# EAGLE board The_Potato (EAGLE 9.6.2)

Size 83 x 74 mm. Coordinates in mm from the lower left corner, seen from the top.
Outline: 0,0 0,74 83,74 83,0 0,0
Copper layers (1*16): Top 0.035mm / dielectric 1.5mm / Bottom 0.035mm
Design rules "default": minimum track width 6mil, minimum drill 0.35mm, track to track 6mil, track to pad 6mil, pad to pad 6mil, via to via 6mil, smd to smd 6mil, copper to edge 40mil, drill to drill 6mil, minimum pad ring 10mil, minimum via ring 8mil, stop-mask expansion 4mil, vias tented up to drill 0mil, thermal gap 10mil
Holes 3.2 mm at 3,3 3,71 80,3 80,71 42.5,20 42.5,54

## Footprints (pad centres in the part's own frame; a part is rotated, then mirrored left to right if it is on the bottom)
DIN7_270 = hole 1.6: -2.475,-2.475; -3.5,0; -2.475,2.475; 0,3.5; 2.475,2.475; 3.5,0; 2.475,-2.475
DIN4_216 = hole 1.6: -3.329,-1.082; -2.057,2.832; 2.057,2.832; 3.329,-1.082
DIN8_262 = hole 1.6: 0,-0.9; -3.3,-2.9; -3.5,0; -2.47,2.47; 0,3.5; 2.47,2.47; 3.5,0; 3.3,-2.9
DIN6_240 = hole 1.6: 0,0; -3.031,-1.75; -3.031,1.75; 0,3.5; 3.031,1.75; 3.031,-1.75
DIN8_270 = hole 1.6: 0,-0.9; -2.475,-2.475; -3.5,0; -2.475,2.475; 0,3.5; 2.475,2.475; 3.5,0; 2.475,-2.475
DIN5_360 = hole 1.6: 0,0; -2.475,-2.475; -2.475,2.475; 2.475,2.475; 2.475,-2.475

## Placement (x,y rotation side)
E$1  [DIN7_270]  32.5,12.5 0 top
E$2  [DIN4_216]  52.5,12.5 0 top
E$3  [DIN8_262]  32.5,36 0 top
E$4  [DIN6_240]  52.5,36 0 top
E$5  [DIN8_270]  32.5,59.5 0 top
E$6  [DIN5_360]  52.5,59.5 0 top
E$7  [SVEN_TAG]  64.61,58.66 0 top
E$8  [OPENHW]  68.41,53 0 top
E$9  [2LAYER]  80,68.5 180 top
E$10  [POTATO]  44.5,64 0 top
E$11  [PCB-TITLE/]  0,81.5 0 top  (outside the outline)
E$12  [ATTENTION]  38.5,43.5 0 top
E$13  [ATTENTION]  46.5,42.5 0 bottom
E$14  [DEKANTUEFFEL]  68.5,64.5 0 bottom

## Library data of the parts
E$1-E$6 = DIN-Templates
E$7 E$8 E$10 E$12-E$14 = Logo
E$9 = I-TEILE
E$11 = DOC_IBSP

## Text on the board
Bottom: 207/00
tNames: They said: "Use a / potato to solder / a DIN connector!" | DIN5/180° | Rev. 0 | VIC-20 A/V | 1: / 2: / 3: / 4: / 5: | +6V / GND / Audio / VLOW / Composite | DIN8/270° | DIN5/360° | http://github.com/ / svenpetersen1965 | DIN41526 | DIN41524 | C64 A/V Jack | IEC-Bus | 1: / 2: / 3: / 4: / 5: / 6: | SRQ / GND / ATN / CLK / DATA / RESET | 1: / 2: / 3: / 4: / 5: / 6: / 7: / 8: | Luma / GND / Audio out / Composite / Audio in / Chroma / n.c. (stereo) / n.c./+5V | DIN8/262° | Mount sheath! | DIN6/240° | Flux helps! | DIN41524 | DIN45322 | C64 Power | 1541-II Power | 1: / 2: / 3: / 4: | +5V / GND / n.c. / +12V | 1: / 2: / 3: / 4: / 5: / 6: / 7: | n.c. (GND) / GND / n.c. (GND) / (+5V) / +5V / 9VAC1 / 9VAC2 | DIN7/270° | DIN4/216° | DIN45329 | DIN41524
bNames: DIN5/180° | Atari 800 | Headphones | Luma / GND / Audio / Composite / Chroma | 1: / 2: / 3: / 4: / 5: | n.c. / L(-) / R(-) / L(+) / R(+) | 1: / 2: / 3: / 4: / 5: | DIN8/270° | DIN5/360° | DIN41526 | DIN41524 | Sega Master/Genesis | TI99/4A / Europe | TI99/4A / Europe | +12V / Y(Compo) / PR(Compo) / PB(Compo) / Audio / GND | +12V / Y(Compo) / PR(Compo) / PB(Compo) / Audio / GND | 1: / 2: / 3: / 4: / 5: / 6: | Audio / GND / Composite / +5V / Green / Red / Sync(RGB) / Blue | 1: / 2: / 3: / 4: / 5: / 6: / 7: / 8: | DIN8/262° | DIN6/240° | Mount sheath! | DIN41524 | DIN45322 | DIN5/180° | DIN5/180° | TI-99/A4 US | Amplifier | Out / GND / In | +12V / GND / Audio / Composite / n.c. | 1: / 2: / 3: / 4: / 5: | Out L / GND / IN L / Out R / In R | 1: / 2: / 3: / 4: / 5: | DIN3/180° | DIN7/270° | DIN4/216° | DIN45329 | DIN41524
Document: 207-2-01-00 | Sven Petersen / 2023 | 35µm | 2 | 0